# Altium PCB MS30517_TX_20240410.PcbDoc
Units mil, origin at the board's own origin, x right, y up, seen from the top; angles counter-clockwise.
Board outline 885 x 1070 mil, 2 copper layers (Top Layer, Bottom Layer); 21 components, 12 nets, 64 pads, 11 vias.
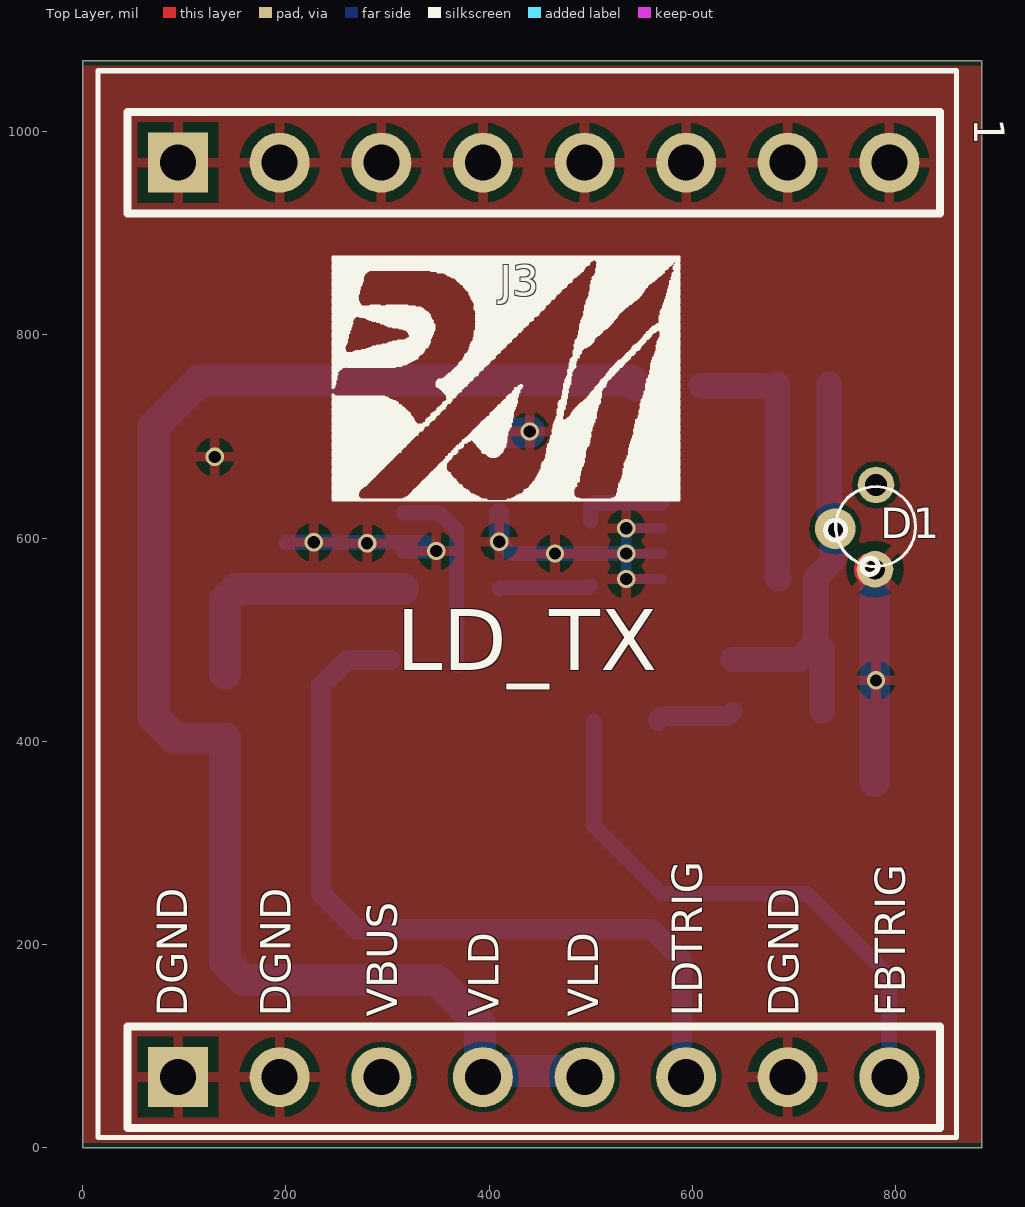
[diagram p0: Top Layer view]
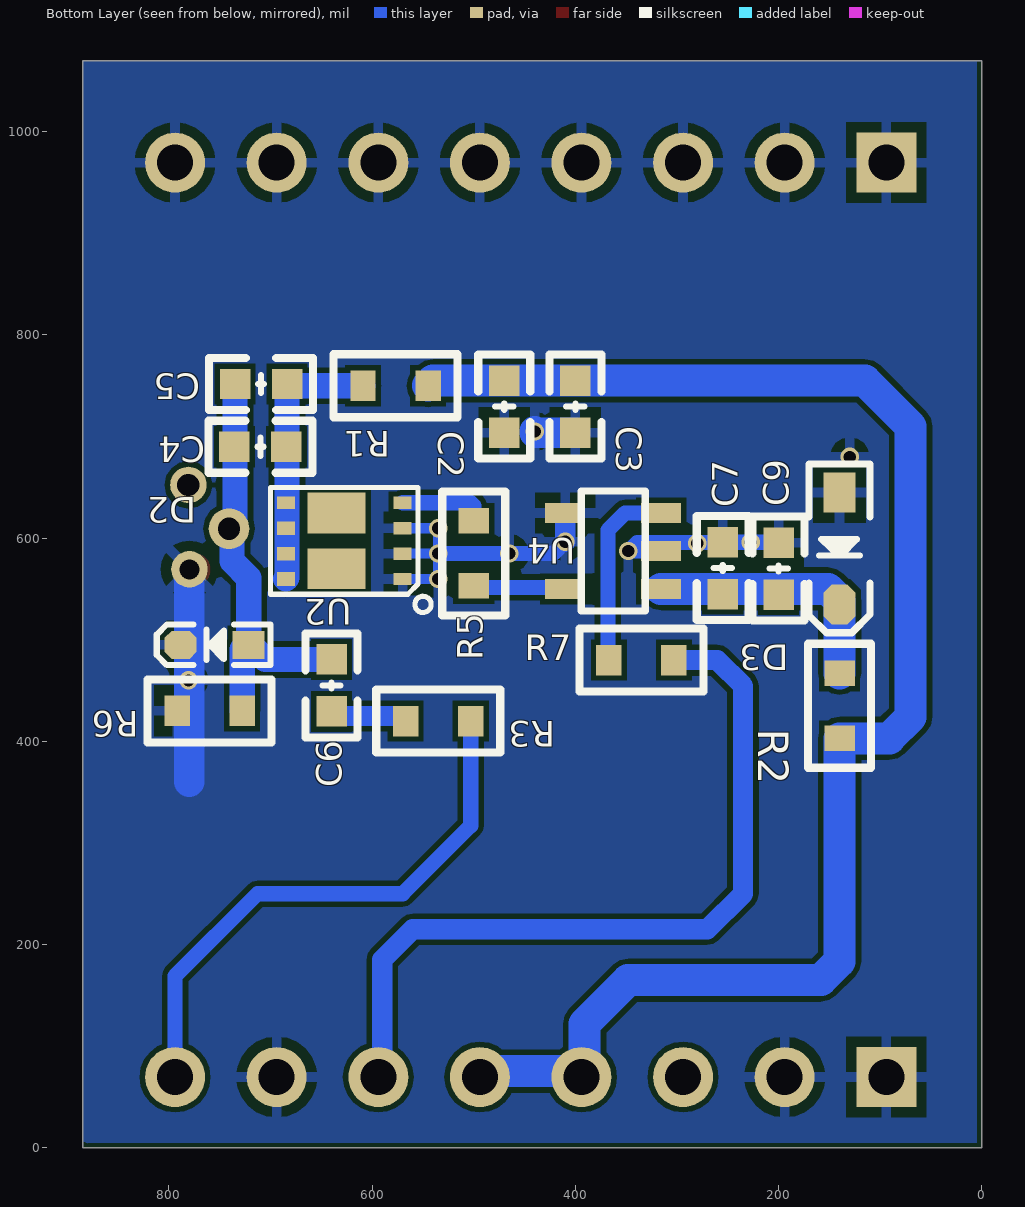
[diagram p1: Bottom Layer view, seen from below]
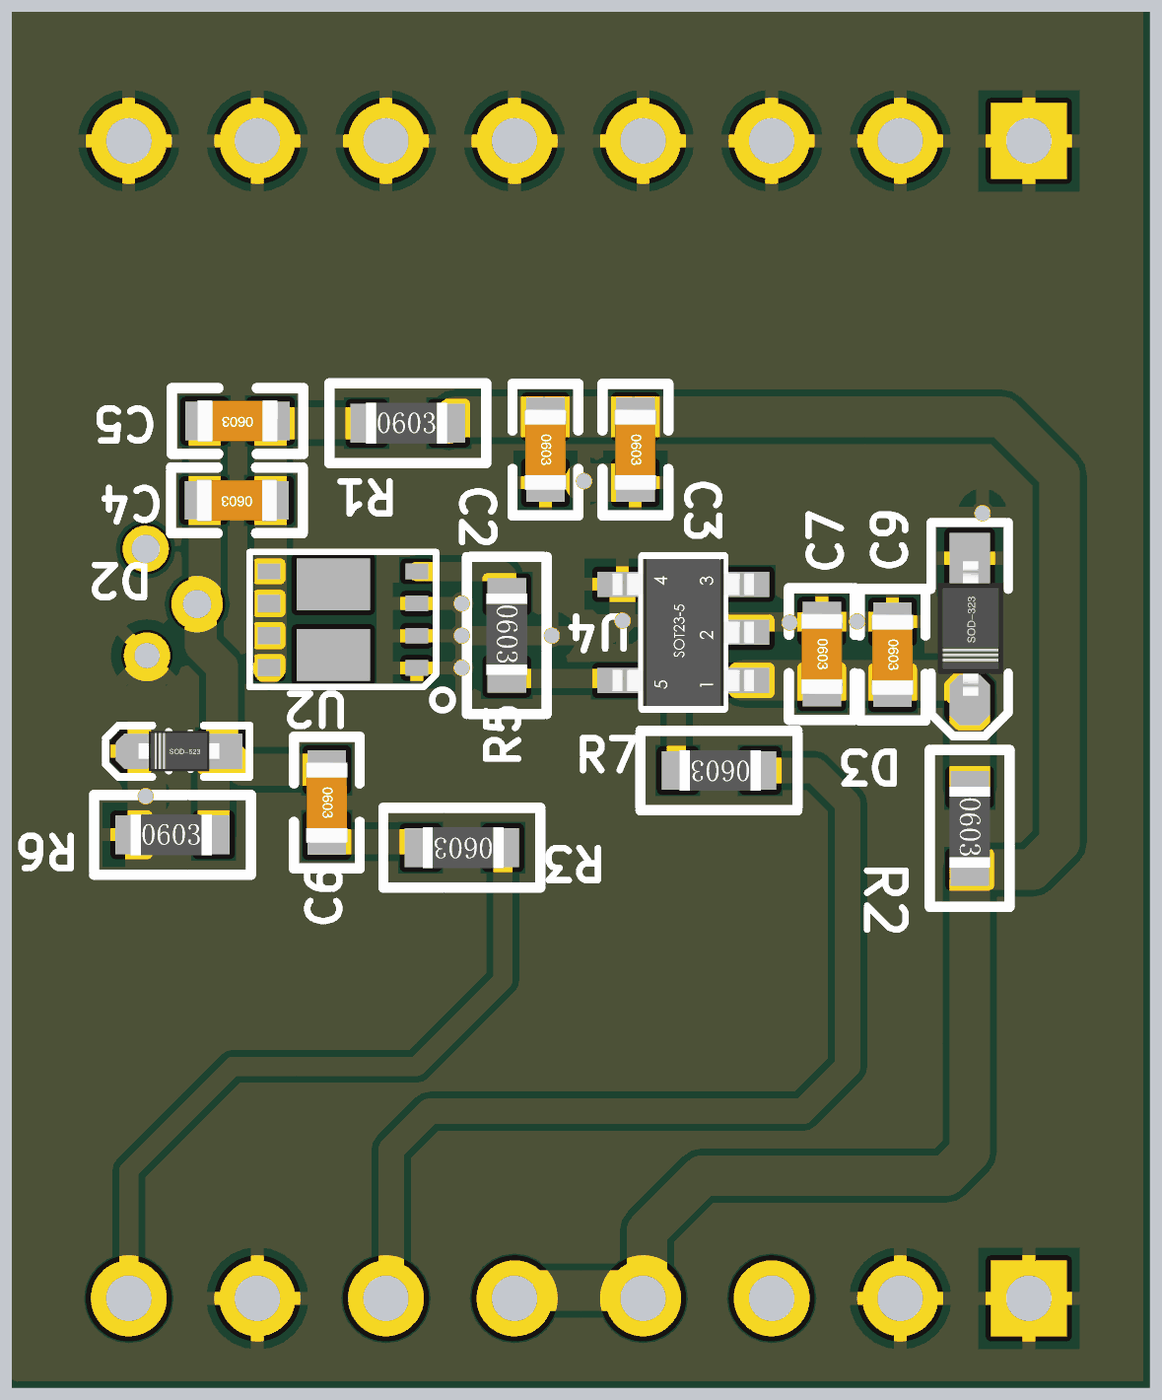
[diagram p2: 3D render of the assembled board from below, using the file's embedded part models]

## Layer stack, top to bottom
Top Solder: solder mask 0.4, Solder Resist, Dk 3.5
Top Layer: signal copper 1.4
Dielectric 1: dielectric 12.6, FR-4, Dk 4.8
Bottom Layer: signal copper 1.4
Bottom Solder: solder mask 0.4, Solder Resist, Dk 3.5

## Board outline
0,0 0,1070 885,1070 885,0

## Design rules (kind name [scope] priority, off if disabled: settings)
Clearance [All] p1: gap=5 ignorepadtopadclearanceinfootprint=FALSE except(0: Arc-Hole Track-Hole SMDPad-Hole THPad-Hole Via-Hole Fill-Hole Poly-Hole Region-Hole Text-Hole)
PolygonConnect [All] p1: connectstyle=Relief reliefconductorwidth=10 reliefentries=4 polygonreliefangle="90 Angle" airgapwidth=10
RoutingVias [All] p1: holewidth=28 width=50 viastyle="Through Hole" minholewidth=28 minwidth=50 maxholewidth=28 maxwidth=50
SolderMaskExpansion [All] p1: expansion=4
Width [All] p1: maxlimit=100 minlimit=5 preferedwidth=10
30 further rules are at their usual default settings.

## Classes and differential pairs
component class TX_RX: C2 C3 C4 C5 C6 C7 C9 D1 D2 D3 q R1 R2 R3 R5 R6 R7 U4

## Components (designator, comment, footprint, x,y, rotation, side; value= is the part's Value field where it differs from the comment)
1 "Header 8" HDR1X8 94.01,969.58 r0 top (schematic designator P5)
C2 "0603X105K500CT" "C 0603_L" 470,729.41 r270 bottom value=1uF/35V
C3 "0603X105K500CT" "C 0603_L" 400,729.41 r270 bottom value=0.1uF/35V
C4 "C0402C331J1GACAUTO" "C 0603_L" 710,690 r0 bottom value=1000pF/50V
C5 "" "C 0603_L" 709.41,751.72 r0 bottom value=1000pF/50V
C6 "" "C 0603_L" 640,455 r270 bottom value=1000pF/50V
C7 "GRM155R71H102KA01D" "C 0603_L" 255,570.59 r270 bottom value=1uF/35V
C9 "(*)GCM155R71H104KE02D" "C 0603_L" 200,570 r270 bottom value=0.1uF/35V
D1 "LD" LD1 780,609.93 r0 top
D2 "BAT41KFILM" SOD-523 755,495 r0 bottom
D3 "稳压二极管10V" SOD-323 140,589.88 r270 bottom value=CMDZ10L
J3 "LOGO" RELMON2 175,830 r0 top
P5 "Header 8" HDR1X8 94.01,69.58 r0 top
R1 "100R" 0603R 577,750 r180 bottom
R2 "10k" 0603R 140,435 r270 bottom
R3 "RC0402FR-7W1KL" 0603R 535,420 r0 bottom value=1k
R5 "CR0402F10RQ10" 0603R 500,585 r270 bottom value=1
R6 "51R" 0603R 760,430 r180 bottom
R7 "51R" 0603R 335,480 r0 bottom
U2 "CSD19538Q3A" QA3 685,559.8 r90 bottom
U4 "UCC27517DBVT" SOT23-5 315.51,550 r90 bottom

## Footprints (in the part's own frame and the unit in brackets; to place one, negate y for a bottom-side part, rotate by r counter-clockwise, add the part's x,y. Pads: shape width x height; smd on the part's side, far side on the other; paste and mask are expansions set on the pad)
0603R [mil]
  rect 25x30 smd: 1(-32,0) 2(32,0)
  silkscreen extent -61,-31 61,31, body extent -32,-16 30,16, height 18
"C 0603_L" [mil] "无极性贴片电容"
  rect 30x30 smd: 1(-25.59,0) 2(25.59,0)
  silkscreen extent -51,-26 51,26, body extent -31,-16 31,16, height 32
HDR1X8 [mm] "Connector; Header; 8 Position"
  rect 1.5x1.5 hole 0.9: 1(0,0)
  round 1.5 hole 0.9: 2(2.54,0) 3(5.08,0) 4(7.62,0) 5(10.16,0) 6(12.7,0) 7(15.24,0) 8(17.78,0)
  silkscreen extent -1.27,-1.27 19.05,1.27
LD1 [mil]
  round 40 hole 22 mask+1.97: 1(-39.13,-0.57)
  round 36 hole 19.68 mask+1.97: 2(-0.13,-40.57)
  round 36 hole 22 mask+1.97: 3(0.87,42.43)
  silkscreen extent -49,-46 40,41
QA3 [mm] "CSD19538Q3A"
  rect 1.02x1.45 smd: 0(0.254,-1.27) 0(1.651,-1.27)
  rect 0.31x0.45 smd: 1(0,-2.921) 2(0.635,-2.921) 3(1.27,-2.921) 4(1.905,-2.921) 5(1.905,0)
  rect 0.34x0.45 smd: 6(1.27,0) 7(0.635,0) 8(0,0)
  silkscreen extent -0.84,-3.63 2.29,0.38
RELMON2 [mil]
  silkscreen extent 71,-193 413,47
SOD-323 [mm] "1.8x1."
  rect 1x0.8 smd: 1(-1.4,0)
  oct 1x0.8 smd: 2(1.4,0)
  silkscreen extent -2.11,-0.76 2.11,0.76, body extent -1.34,-0.63 1.31,0.67, height 1
SOD-523 [mm] "1.2x0.8X0.6mm（长宽高，不包括引脚）"
  rect 0.8x0.7 smd: 1(-0.85,0)
  oct 0.8x0.7 smd: 2(0.85,0)
  silkscreen extent -1.4,-0.51 1.45,0.51, body extent -0.8,-0.4 0.8,0.4, height 0.65
SOT23-5 [mm]
  rect 0.5x1 smd: 1(0,0) 2(0.95,0) 3(1.9,0) 4(1.9,2.4) 5(0,2.4)
  silkscreen extent -0.55,0.4 2.45,2, body extent -0.5,-0.2 2.4,2.6, height 1.09

## Part data
1 P5: "Header, 8-Pin"
C2 C3: library part Cap, "Walsin - 1uF, 50V, X5R, 10%", LatestRevisionDate=17-Jul-2002, LatestRevisionNote="Re-released for DXP Platform.", PackageDescription="Radial Cap, Thru-Hole; 2 Leads; 0.3 in Pin Spacing", PackageReference=RAD-0.3, Published=8-Jun-2000, Publisher="Altium Limited"
C4 C6: library part Cap, "1000pF,  0402 ,50V, NP0, 2%", LatestRevisionDate=17-Jul-2002, LatestRevisionNote="Re-released for DXP Platform.", PackageDescription="Radial Cap, Thru-Hole; 2 Leads; 0.3 in Pin Spacing", PackageReference=RAD-0.3, Published=8-Jun-2000, Publisher="Altium Limited"
C5: library part Cap, "1000pF,  0402 ,50V, NP0, 5%", LatestRevisionDate=17-Jul-2002, LatestRevisionNote="Re-released for DXP Platform.", PackageDescription="Radial Cap, Thru-Hole; 2 Leads; 0.3 in Pin Spacing", PackageReference=RAD-0.3, Published=8-Jun-2000, Publisher="Altium Limited"
C7: library part CAP, "Murata - 1nF, 50V, X7R, 10%"
C9: library part CAP, "Murata - 0.1uF, 50V, X7R, 10%"
D1: library part LD_Cathode_NOPD, "Laser"
D2: library part Diode, "STM - Sckottky, 200mA, 100 V", Code_JEDEC=DO-214-AB, LatestRevisionDate=17-Jul-2002, LatestRevisionNote="Re-released for DXP Platform.", PackageDescription="DO-214-AB/SMC; 2 C-Bend Leads; Body 7.9 x 5.9 mm, inc. leads (LxW)", PackageReference=SMC, PackageVersion=Sep-1996, Published=8-Jun-2000, Publisher="Altium Limited"
D3: library part DIODE, "Diode"
J3: library part CON1, "Connector"
R1 R3: library part Res1, "Yageo - 1K, 1/8W, 1 %", LatestRevisionDate=17-Jul-2002, LatestRevisionNote="Re-released for DXP Platform.", PackageDescription="Axial Device, Thru-Hole; 2 Leads; 0.3 in Pin Spacing", PackageReference=AXIAL-0.3, Published=8-Jun-2000, Publisher="Altium Limited"
R2 R6 R7: library part RES1
R5: library part Res1, "10ohm, 0402,1/16W, 1 %", LatestRevisionDate=17-Jul-2002, LatestRevisionNote="Re-released for DXP Platform.", PackageDescription="Axial Device, Thru-Hole; 2 Leads; 0.3 in Pin Spacing", PackageReference=AXIAL-0.3, Published=8-Jun-2000, Publisher="Altium Limited"
U2: library part N_MOSFET
U4: library part UC27517A, "UCC27157", Manufacturer_Part_Number=MCP9501PT-115E/OT, Built_By=EMA_Jessica, Copyright="Copyright (C) 2018 Accelerated Designs. All rights reserved", RefDes=RefDes, SourceLibrary=Microchip_2019-08-23_21, Type=DEV, Vendor=Microchip

## Via types
v1: diameter 18, hole 12, Top Layer to Bottom Layer, tented both sides, 11 vias

## Nets (pads, with @x,y where several pads share a name; then routed paths per layer and width w, separated by ;. In a path a pad name is that pad's centre, name@x,y a point inside that pad or via, vN(x,y) a via of type N, cw(c..) or ccw(c..) an arc to the next point about the centre after c; other vN are vias at no path point)
10V: C7.2 C9.2 D3.2 R2.1 U4.1 | length 251.9
  Bottom Layer w31.5: R2.1 D3.2 140,538.7 151.3,550 200,550 255,550 U4.1
FB_Triger: P5.8 R3.1 | length 554.7
  Bottom Layer w15: R3.1 503,317 570,250 713,250 794.01,168.99 P5.8
LDGND: 1.1 1.2 1.3 1.4 1.5 1.6 1.7 1.8 C2.2 C3.2 C7.1 C9.1 D1.2 D2.2 D3.1 P5.1 P5.2 P5.7 R6.1 U2.1 U2.2 U2.3 U4.2 U4.4 | length 803.6
  Top Layer w30: D1.2@774,568.38 D1.2@774,570
  Bottom Layer w10: U2.1 v1(535,559.8) v1(535,584.8) ; U2.2 v1(535,584.8) ; U2.3 v1(535,609.8) v1(535,584.8)
  Bottom Layer w15: C7.1 254.71,595.89 200.3,595.89 C9.1 339,595.59 v1@347.19,587.4 ; U4.2 v1@347.19,587.4 ; v1(348,587.4) v1@347.19,587.4 ; v1(410,596.5) 421.7,584.8 v1(535,584.8)
  Bottom Layer w20: v1(410,596.5) U4.4
  Bottom Layer w30: C3.2 440,703.82 v1(440,705) ; 779.87,360 D1.2
  other v1: 780.87,460 465,584.8 280,595 227.5,595.89 130,680
LDTRIG5: P5.6 R7.1 | length 774.9
  Bottom Layer w20: R7.1 260.5,480 235,454.5 235,250 270,215 560,215 590,185 590,76.53 P5.6@591.01,75.52
NetC4_1: C4.1 C5.1 R1.1 U2.5 U2.6 U2.7 U2.8 | length 252.8
  Bottom Layer w25: R1.1 C5.1@669.4,750 ; C5.1 683.82,690 683.82,560.98 U2.8
NetC4_2: C4.2 C5.2 C6.1 D1.1 D2.1 R6.2 | length 426.2
  Top Layer w15: D1.1@738.96,611.27 D1.1
  Bottom Layer w25: C6.1 705.16,480.59 719.57,495 D2.1 ; R6.2 728,490.5 723.5,495 D2.1 ; C5.2 735,619.29 740.87,613.42 D1.1 738,606.49 738,577.36 721.54,560.89 D2.1
NetC6_2: C6.2 R3.2 | length 78.1
  Bottom Layer w19.68: R3.2 567,422.05 569.66,424.71 635.3,424.71 C6.2
NetR5_1: R5.1 U2.4 | length 86.2
  Bottom Layer w15: R5.1 500,632 502.8,634.8 U2.4
NetR5_2: R5.2 U4.5 | length 91.2
  Bottom Layer w15: U4.5 411.5,551.5 498.5,551.5 R5.2
NetR7_2: R7.2 U4.3 | length 192.5
  Bottom Layer w15: U4.3 351.21,624.8 368,608.02 R7.2@368,475
VBUS: P5.3
VLD: C2.1 C3.1 P5.4 P5.5 R1.2 R2.2 | length 1502.9
  Bottom Layer w31.5: P5.5@491.01,75.52 391.01,75.52 391.01,121.99 348,165 158.45,165 140,183.45 R2.2 91.01,403 70,424.01 70,710 115,755 C3.1 C2.1 540,755 R1.2
pads on no net: D1.3 U2.0

## Polygon pours and split planes (outlines as drawn)
LDGND on Top Layer "LDGND_L01_P014" (solid, remove dead copper, pour order 14): 0,5 885,5 885,1065 0,1065
LDGND on Top Layer "GNDS" (solid, remove dead copper, pour order 10): 630,369.93
LDGND on Bottom Layer "LDGND_L02_P012" (solid, remove dead copper, pour order 12): 5,5 880,5 885,0 885,1070 5,1070

## Silkscreen, mask and mechanical layers (free items; w line width, h text height)
Top Overlay:
  lines w5: 15,10 860,10 860,1060 15,1060 15,10
  text "LD_TX" at 308.52,470 h60
  text "DGND" at 103.1,129 h30 r90
  text "DGND" at 204.94,129 h30 r90
  text "VBUS" at 309.63,129 h30 r90
  text "VLD" at 409.63,129 h30 r90
  text "VLD" at 507.62,129 h30 r90
  text "LDTRIG" at 609.63,129 h30 r90
  text "DGND" at 704.94,129 h30 r90
  text "FBTRIG" at 809.63,129 h30 r90
Mechanical 1:
  lines w5: 0,0 0,1070 94.93,1070 785.07,1070 885,1070 885,0 0,0